# Altium PCB PCB1.PcbDoc
Units mm, origin at the board's own origin, x right, y up, seen from the top; angles counter-clockwise.
Board outline 25.02 x 33.15 mm, 2 copper layers (Top Layer, Bottom Layer); 2 components, 8 nets, 29 pads, 18 vias.
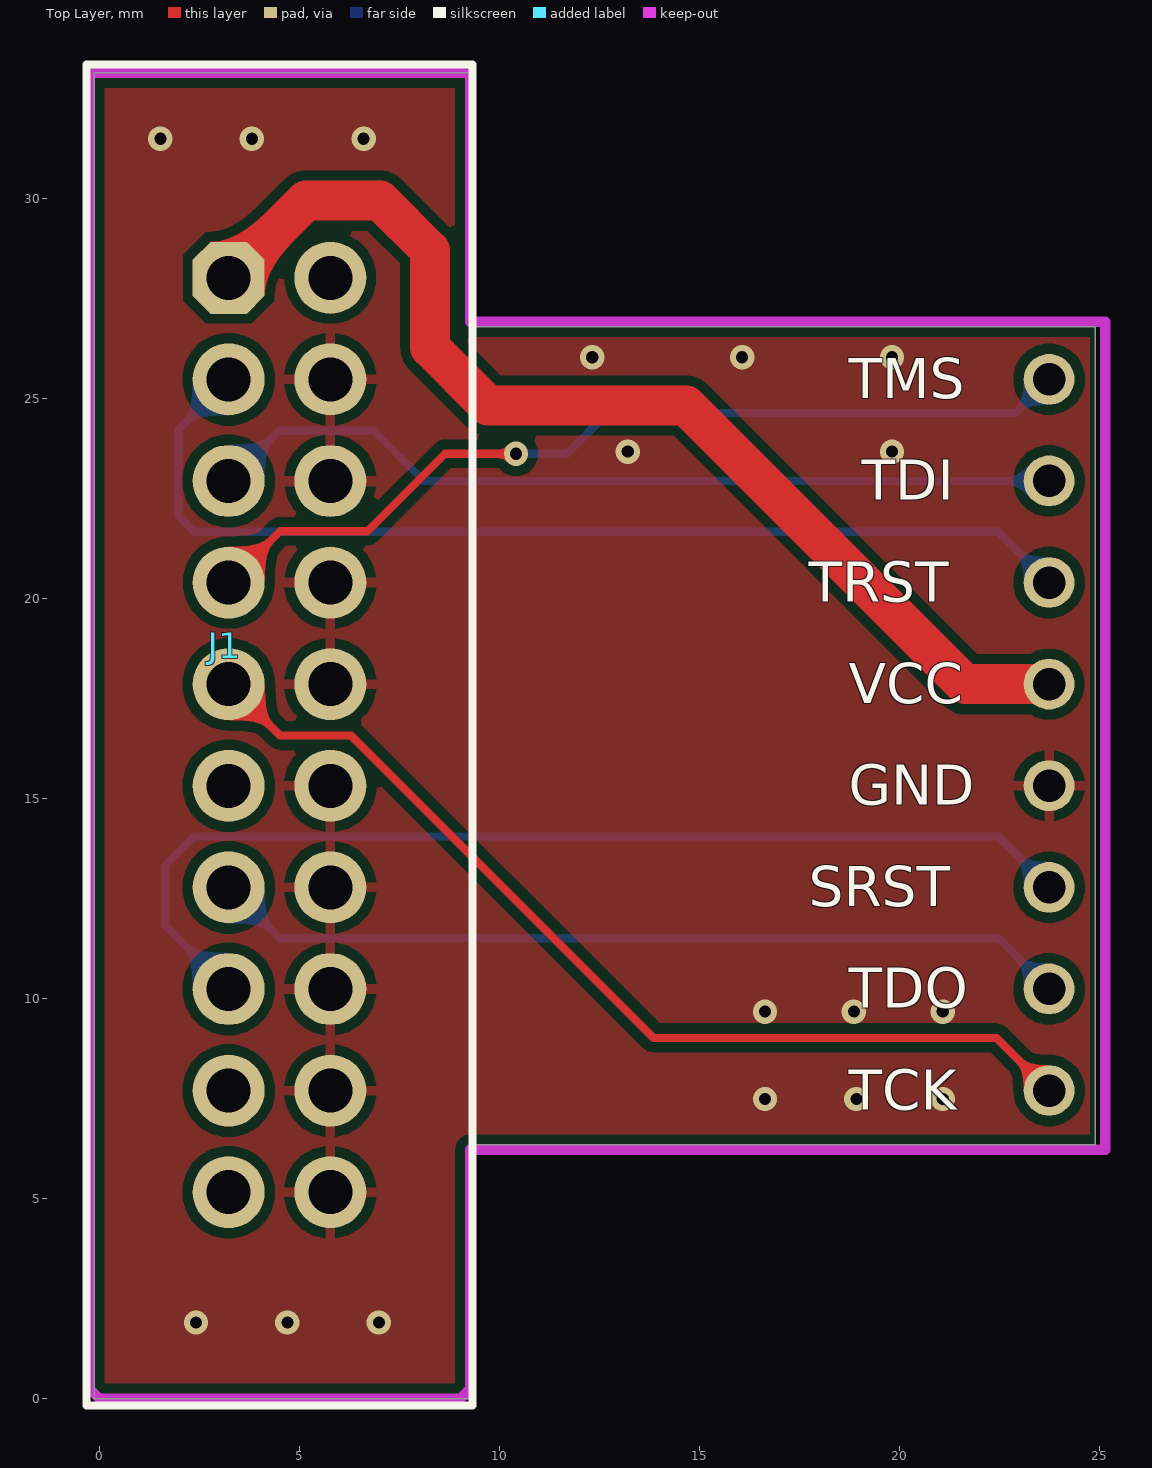
[diagram p0: Top Layer view]
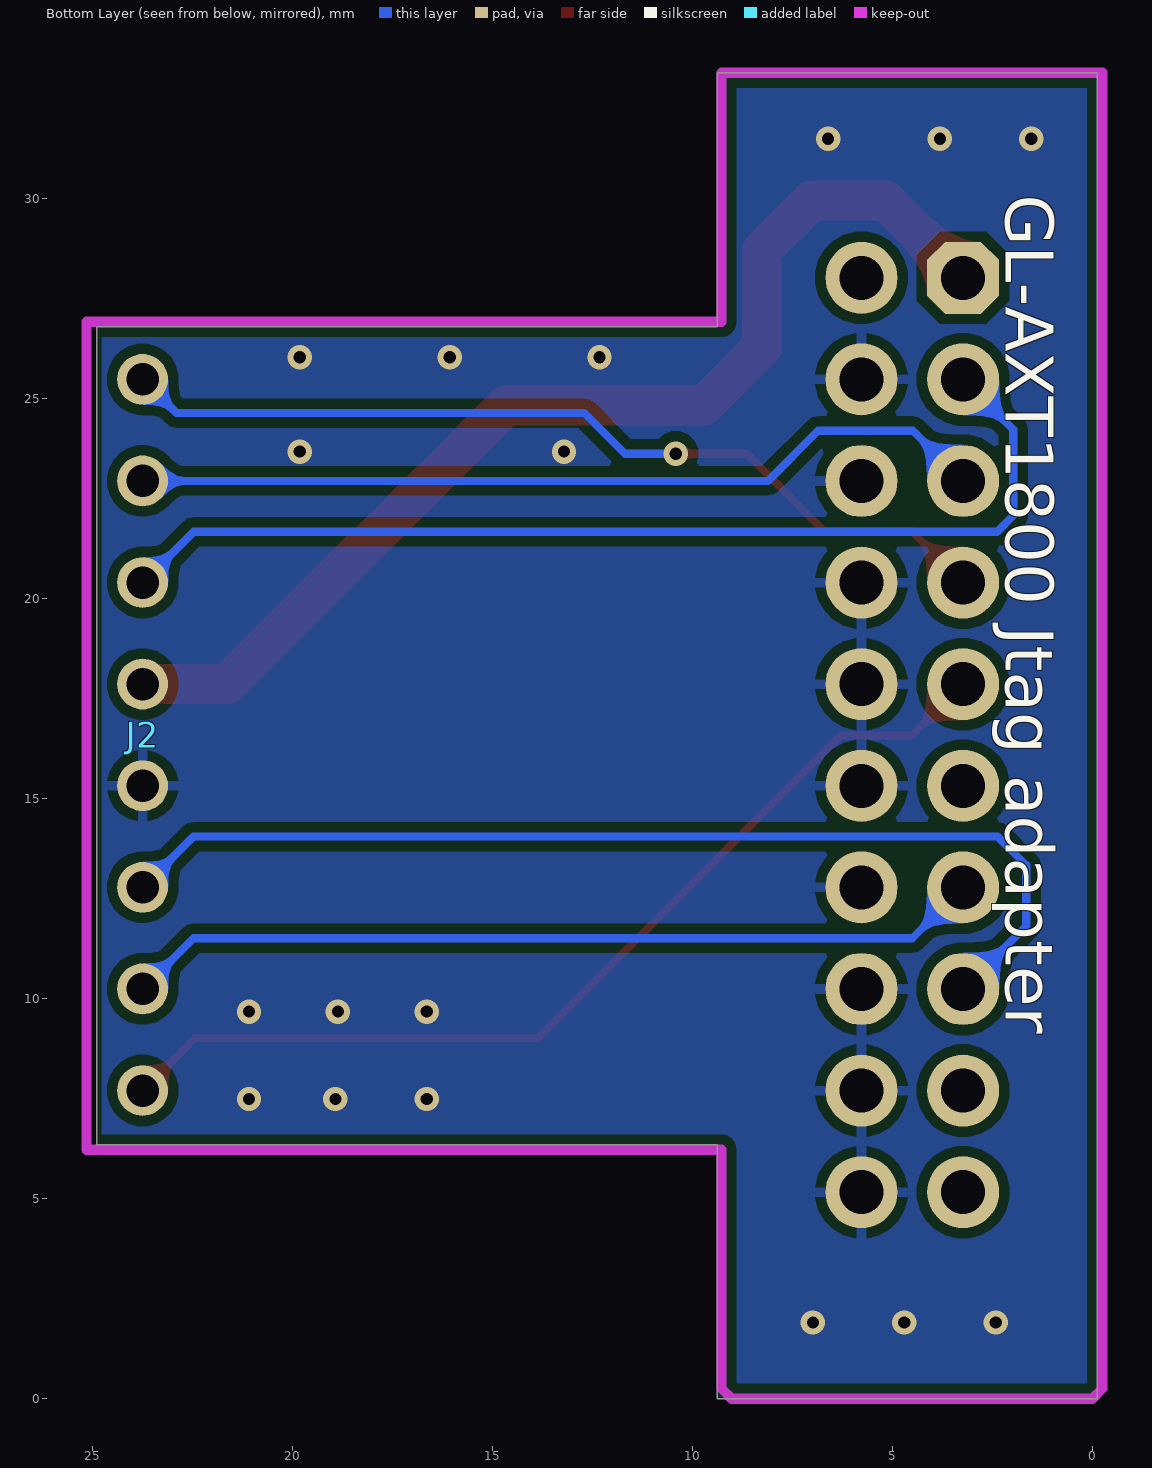
[diagram p1: Bottom Layer view, seen from below]

## Layer stack, top to bottom
Top Solder: solder mask 0.0102, Solder Resist, Dk 3.5
Top Layer: signal copper 0.0356
Dielectric 1: dielectric 0.32, FR-4, Dk 4.8
Bottom Layer: signal copper 0.0356
Bottom Solder: solder mask 0.0102, Solder Resist, Dk 3.5

## Board outline
-0.127,0 -0.127,33.147 9.373,33.147 9.373,26.797 24.892,26.797 24.892,6.35 9.373,6.35 9.373,0

## Design rules (kind name [scope] priority, off if disabled: settings)
Clearance [All] p1: gap=0.254 ignorepadtopadclearanceinfootprint=FALSE except(0: Arc-Hole Track-Hole SMDPad-Hole THPad-Hole Via-Hole Fill-Hole Poly-Hole Region-Hole Text-Hole)
PolygonConnect [All] p1: thpad.connectstyle=Relief thpad.reliefconductorwidth=0.254 thpad.reliefentries=4 thpad.polygonreliefangle="90 Angle" thpad.airgapwidth=0.254 smdpad.connectstyle=Relief smdpad.reliefconductorwidth=0.254 smdpad.reliefentries=4 smdpad.polygonreliefangle="90 Angle" smdpad.airgapwidth=0.254 via.connectstyle=Direct via.reliefconductorwidth=0.254 via.reliefentries=4 via.polygonreliefangle="90 Angle" via.airgapwidth=0.254
RoutingVias [All] p1: holewidth=0.305 width=0.61 viastyle="Through Hole" minholewidth=0.305 minwidth=0.61 maxholewidth=0.305 maxwidth=0.61
SolderMaskExpansion [All] p1: expansion=0.102 istentingtop=FALSE
Width Width_Power [(InNet('GND') OR InNet('VCC'))] p1: maxlimit=1 minlimit=0.5 preferedwidth=0.5
Width [All] p2: maxlimit=0.203 minlimit=0.203 preferedwidth=0.203
30 further rules are at their usual default settings.

## Components (designator, comment, footprint, x,y, rotation, side; value= is the part's Value field where it differs from the comment)
J1 "HDR2x10" JTAG-20P-2.54 4.5,16.592 r270 top
J2 "HDR1x8" HDR1X8_2.54_180F 23.741,7.704 r0 bottom value=2.54

## Footprints (in the part's own frame and the unit in brackets; to place one, negate y for a bottom-side part, rotate by r counter-clockwise, add the part's x,y. Pads: shape width x height; smd on the part's side, far side on the other; paste and mask are expansions set on the pad)
HDR1X8_2.54_180F [mil]
  round 50 hole 32: 1(0,0) 2(0,-100) 3(0,-200) 4(0,-300) 5(0,-400) 6(0,-500) 7(0,-600) 8(0,-700)
  body extent -49,-755 49,55, height 335
JTAG-20P-2.54 [mm]
  oct 1.8x1.8 hole 1.1: 1(-11.43,-1.27)
  round 1.8 hole 1.1: 2(-11.43,1.27) 3(-8.89,-1.27) 4(-8.89,1.27) 5(-6.35,-1.27) 6(-6.35,1.27) 7(-3.81,-1.27) 8(-3.81,1.27) 9(-1.27,-1.27) 10(-1.27,1.27) 11(1.27,-1.27) 12(1.27,1.27) 13(3.81,-1.27) 14(3.81,1.27) 15(6.35,-1.27) 16(6.35,1.27) 17(8.89,-1.27) 18(8.89,1.27) 19(11.43,-1.27) 20(11.43,1.27)
  round 0.5 on Mech1: 41(-15.9,-4)
  silkscreen extent -16.76,-4.83 16.76,4.83, body extent -16.43,-4.52 16.57,4.58, height 9

## Part data
J1: library part HDR2x10_2.54, "Header"
J2: library part HDR1x8_2.54, "Header", Type="DIP 1x8"

## Via types
v1: diameter 0.61, hole 0.305, Top Layer to Bottom Layer, tented both sides, 18 vias

## Nets (pads, with @x,y where several pads share a name; then routed paths per layer and width w, separated by ;. In a path a pad name is that pad's centre, name@x,y a point inside that pad or via, vN(x,y) a via of type N, cw(c..) or ccw(c..) an arc to the next point about the centre after c; other vN are vias at no path point)
GND: J1.4 J1.6 J1.8 J1.10 J1.12 J1.14 J1.16 J1.18 J1.20 J2.4
  other v1: 2.413,1.905 4.699,1.905 6.985,1.905 16.637,7.493 18.923,7.493 21.082,7.493 16.637,9.677 18.859,9.677 21.082,9.677 13.208,23.676 19.812,23.676 12.319,26.035 16.065,26.035 19.812,26.035 1.524,31.496 3.81,31.496 6.604,31.496
SRST: J1.15 J2.3 | length 26.7
  Bottom Layer w0.203: J1.15 1.651,11.821 1.651,13.335 2.368,14.052 22.473,14.052 J2.3
TCK: J1.9 J2.1 | length 24.7
  Top Layer w0.203: J1.9 4.514,16.578 6.29,16.578 13.851,9.017 22.428,9.017 J2.1
TDI: J1.5 J2.7 | length 21.6
  Bottom Layer w0.203: J1.5 4.486,24.198 6.858,24.198 8.112,22.944 J2.7
TDO: J1.13 J2.2 | length 21.6
  Bottom Layer w0.203: J1.13 4.5,11.512 22.473,11.512 J2.2
TMS: J1.7 J2.8 | length 22.6
  Top Layer w0.203: J1.7 4.514,21.686 6.7,21.686 8.636,23.622 v1(10.414,23.622)
  Bottom Layer w0.203: v1(10.414,23.622) 11.684,23.622 12.7,24.638 22.895,24.638 J2.8
TRST: J1.3 J2.6 | length 26.4
  Bottom Layer w0.203: J1.3 1.974,24.226 1.974,22.077 2.38,21.672 22.473,21.672 J2.6
VCC: J1.1 J2.5 | length 27.7
  Top Layer w1: J1.1 5.16,29.952 7.015,29.952 8.263,28.704 8.263,26.281 9.716,24.828 14.668,24.828 21.633,17.864 J2.5
pads on no net: J1.2 J1.11 J1.17 J1.19 J1.41

## Polygon pours and split planes (outlines as drawn)
GND on Top Layer "GND_L01_P000" (solid, remove dead copper, pour order 0): -0.254,0 9.144,0 9.144,6.477 25.273,6.477 25.273,26.797 9.144,26.797 9.144,33.147 -0.254,33.147
GND on Bottom Layer "GND_L02_P001" (solid, remove dead copper, pour order 1): -0.127,33.147 9.144,33.147 9.144,26.797 25.527,26.797 25.527,6.35 9.144,6.35 9.144,-0.254 -0.127,-0.254 -0.254,-0.127 -0.127,0

## Keep-outs
Keep-Out Layer:
  lines w0.254: -0.254,0.254 -0.254,33.147 9.271,33.147 9.271,26.924 25.146,26.924 25.146,6.223 9.271,6.223 9.271,0.254 9.017,0 0,0 -0.254,0.254

## Silkscreen, mask and mechanical layers (free items; w line width, h text height)
Top Overlay:
  text "TMS" at 18.726,25.007 h1
  text "TDI" at 19.059,22.467 h1
  text "TRST" at 17.726,19.927 h1
  text "VCC" at 18.726,17.387 h1
  text "GND" at 18.726,14.847 h1
  text "SRST" at 17.726,12.307 h1
  text "TDO" at 18.726,9.767 h1
  text "TCK" at 18.726,7.227 h1
Bottom Overlay:
  text "GL-AXT1800 Jtag adapter" at 2.159,30.099 h1.2 r90